# EAGLE board Glorious Leelo-Bruticus (EAGLE 7.6.0)

Size 73.58 x 63.39 mm. Coordinates in mm from the lower left corner, seen from the top.
Outline: 0,0 56.82,0 56.82,53.33 0,53.33 0,0
Copper layers (1*16): Top 0.035mm / dielectric 1.5mm / Bottom 0.035mm
Design rules "default": minimum track width 10mil, minimum drill 24mil, track to track 8mil, track to pad 8mil, pad to pad 8mil, via to via 8mil, smd to smd 8mil, copper to edge 40mil, drill to drill 8mil, minimum pad ring 10mil, minimum via ring 8mil, stop-mask expansion 4mil, vias tented up to drill 0mil, thermal gap 10mil

## Footprints (pad centres in the part's own frame; a part is rotated, then mirrored left to right if it is on the bottom)
HDSP-M = drill 0.813 long: 1 -5.08,-7.62; 2 -2.54,-7.62; 3 0,-7.62; 4 2.54,-7.62; 5 5.08,-7.62; 6 5.08,7.62; 7 2.54,7.62; 8 0,7.62; 9 -2.54,7.62; 10 -5.08,7.62
0207/10 = drill 0.813 octagon: 1 -5.08,0; 2 5.08,0
TL1105 = drill 1 pad 1.676: 1 -2.25,3.25; 2 2.25,3.25; 3 -2.25,-3.25; 4 2.25,-3.25
M251 = drill 0.813 long: 1 -2.54,0; 2 0,0; 3 2.54,0
ARDUINO_UNO = drill 1.016 pad 1.88: 0 63.5,50.8; 1 60.96,50.8; 2 58.42,50.8; 3 55.88,50.8; 3.3V 35.56,2.54; 4 53.34,50.8; 5 50.8,50.8; 5V 38.1,2.54; 6 48.26,50.8; 7 45.72,50.8; 8 41.656,50.8; 9 39.116,50.8; 10 36.576,50.8; 11 34.036,50.8; 12 31.496,50.8; 13 28.956,50.8; A0 50.8,2.54; A1 53.34,2.54; A2 55.88,2.54; A3 58.42,2.54; A4 60.96,2.54; A5 63.5,2.54; AREF 23.876,50.8; GND 26.416,50.8; GND. 43.18,2.54; GND.. 40.64,2.54; I/OREF 30.48,2.54; N/C 27.94,2.54; RESET 33.02,2.54; SCL 18.796,50.8; SDA 21.336,50.8; VIN 45.72,2.54 | hole 3.2: 66.04,7.62; 66.04,35.56; 15.24,50.8; 13.97,2.54

## Placement (x,y rotation side)
Digit1  [HDSP-M]  5,22.78 0 top
Digit2  [HDSP-M]  5,35.48 0 top
Digit3  [HDSP-M]  5,48.18 0 top
R1  1k‎Ω  [0207/10]  5,60.88 0 top
R2  1k‎Ω  [0207/10]  5,73.58 0 top  (outside the outline)
R3  1k‎Ω  [0207/10]  5,86.28 0 top  (outside the outline)
R4  1k‎Ω  [0207/10]  5,124.38 0 top  (outside the outline)
R5  1k‎Ω  [0207/10]  5,137.08 0 top  (outside the outline)
S1  [TL1105]  5,98.98 0 top  (outside the outline)
S2  [M251]  5,111.68 0 top  (outside the outline)
U1  [ARDUINO_UNO]  5,10.08 0 top

## Library data of the parts
Digit1-Digit3 R1-R5 S1 S2 U1 = AUTODESK_CIRCUITS_BREADBOARD

## Nets
N$1: Digit1.8
N$2: Digit2.3 R2.2
N$3: Digit2.8
N$4: Digit1.7 Digit2.7 Digit3.7 U1.4
N$5: Digit1.1 Digit2.1 Digit3.1 U1.9
N$6: Digit1.4 Digit2.4 Digit3.4 U1.7
N$7: Digit1.9 Digit2.9 Digit3.9 U1.11
N$8: Digit1.10 Digit2.10 Digit3.10 U1.10
N$9: Digit3.3 R1.2
N$10: Digit3.8
N$11: Digit1.2 Digit2.2 Digit3.2 U1.8
N$12: Digit1.5 Digit2.5 Digit3.5 U1.6
N$13: Digit1.6 Digit2.6 Digit3.6 U1.5
N$14: R1.1 U1.3
N$15: R2.1 U1.12
N$16: R3.2 U1.13
N$17: Digit1.3 R3.1
N$18: R4.2 S1.4
N$19: S1.3 S2.1 U1.5V
N$20: S1.2 U1.2
N$21: S1.1
N$22: R4.1 S2.3 U1.GND..
N$23: R5.2 S2.2 U1.0

## Tracks (layer width: path | path; a pad name or v marks a point on that pad's centre or on a via)
N$2  (1 unrouted)
N$4  (3 unrouted)
N$5  (3 unrouted)
N$6  (3 unrouted)
N$7  (3 unrouted)
N$8  (3 unrouted)
N$9  (1 unrouted)
N$11  (3 unrouted)
N$12  (3 unrouted)
N$13  (3 unrouted)
N$14  (1 unrouted)
N$15  (1 unrouted)
N$16  (1 unrouted)
N$17  (1 unrouted)
N$18  (1 unrouted)
N$19  (2 unrouted)
N$20  (1 unrouted)
N$22  (2 unrouted)
N$23  (2 unrouted)